# Altium PCB PCB1.PcbDoc (part 3 of 3)
Units mil, origin at the board's own origin, x right, y up, seen from the top; angles counter-clockwise.
Board outline 3937.01 x 3937.01 mil, 2 copper layers (Top Layer, Bottom Layer); 162 components, 129 nets, 526 pads, 166 vias.
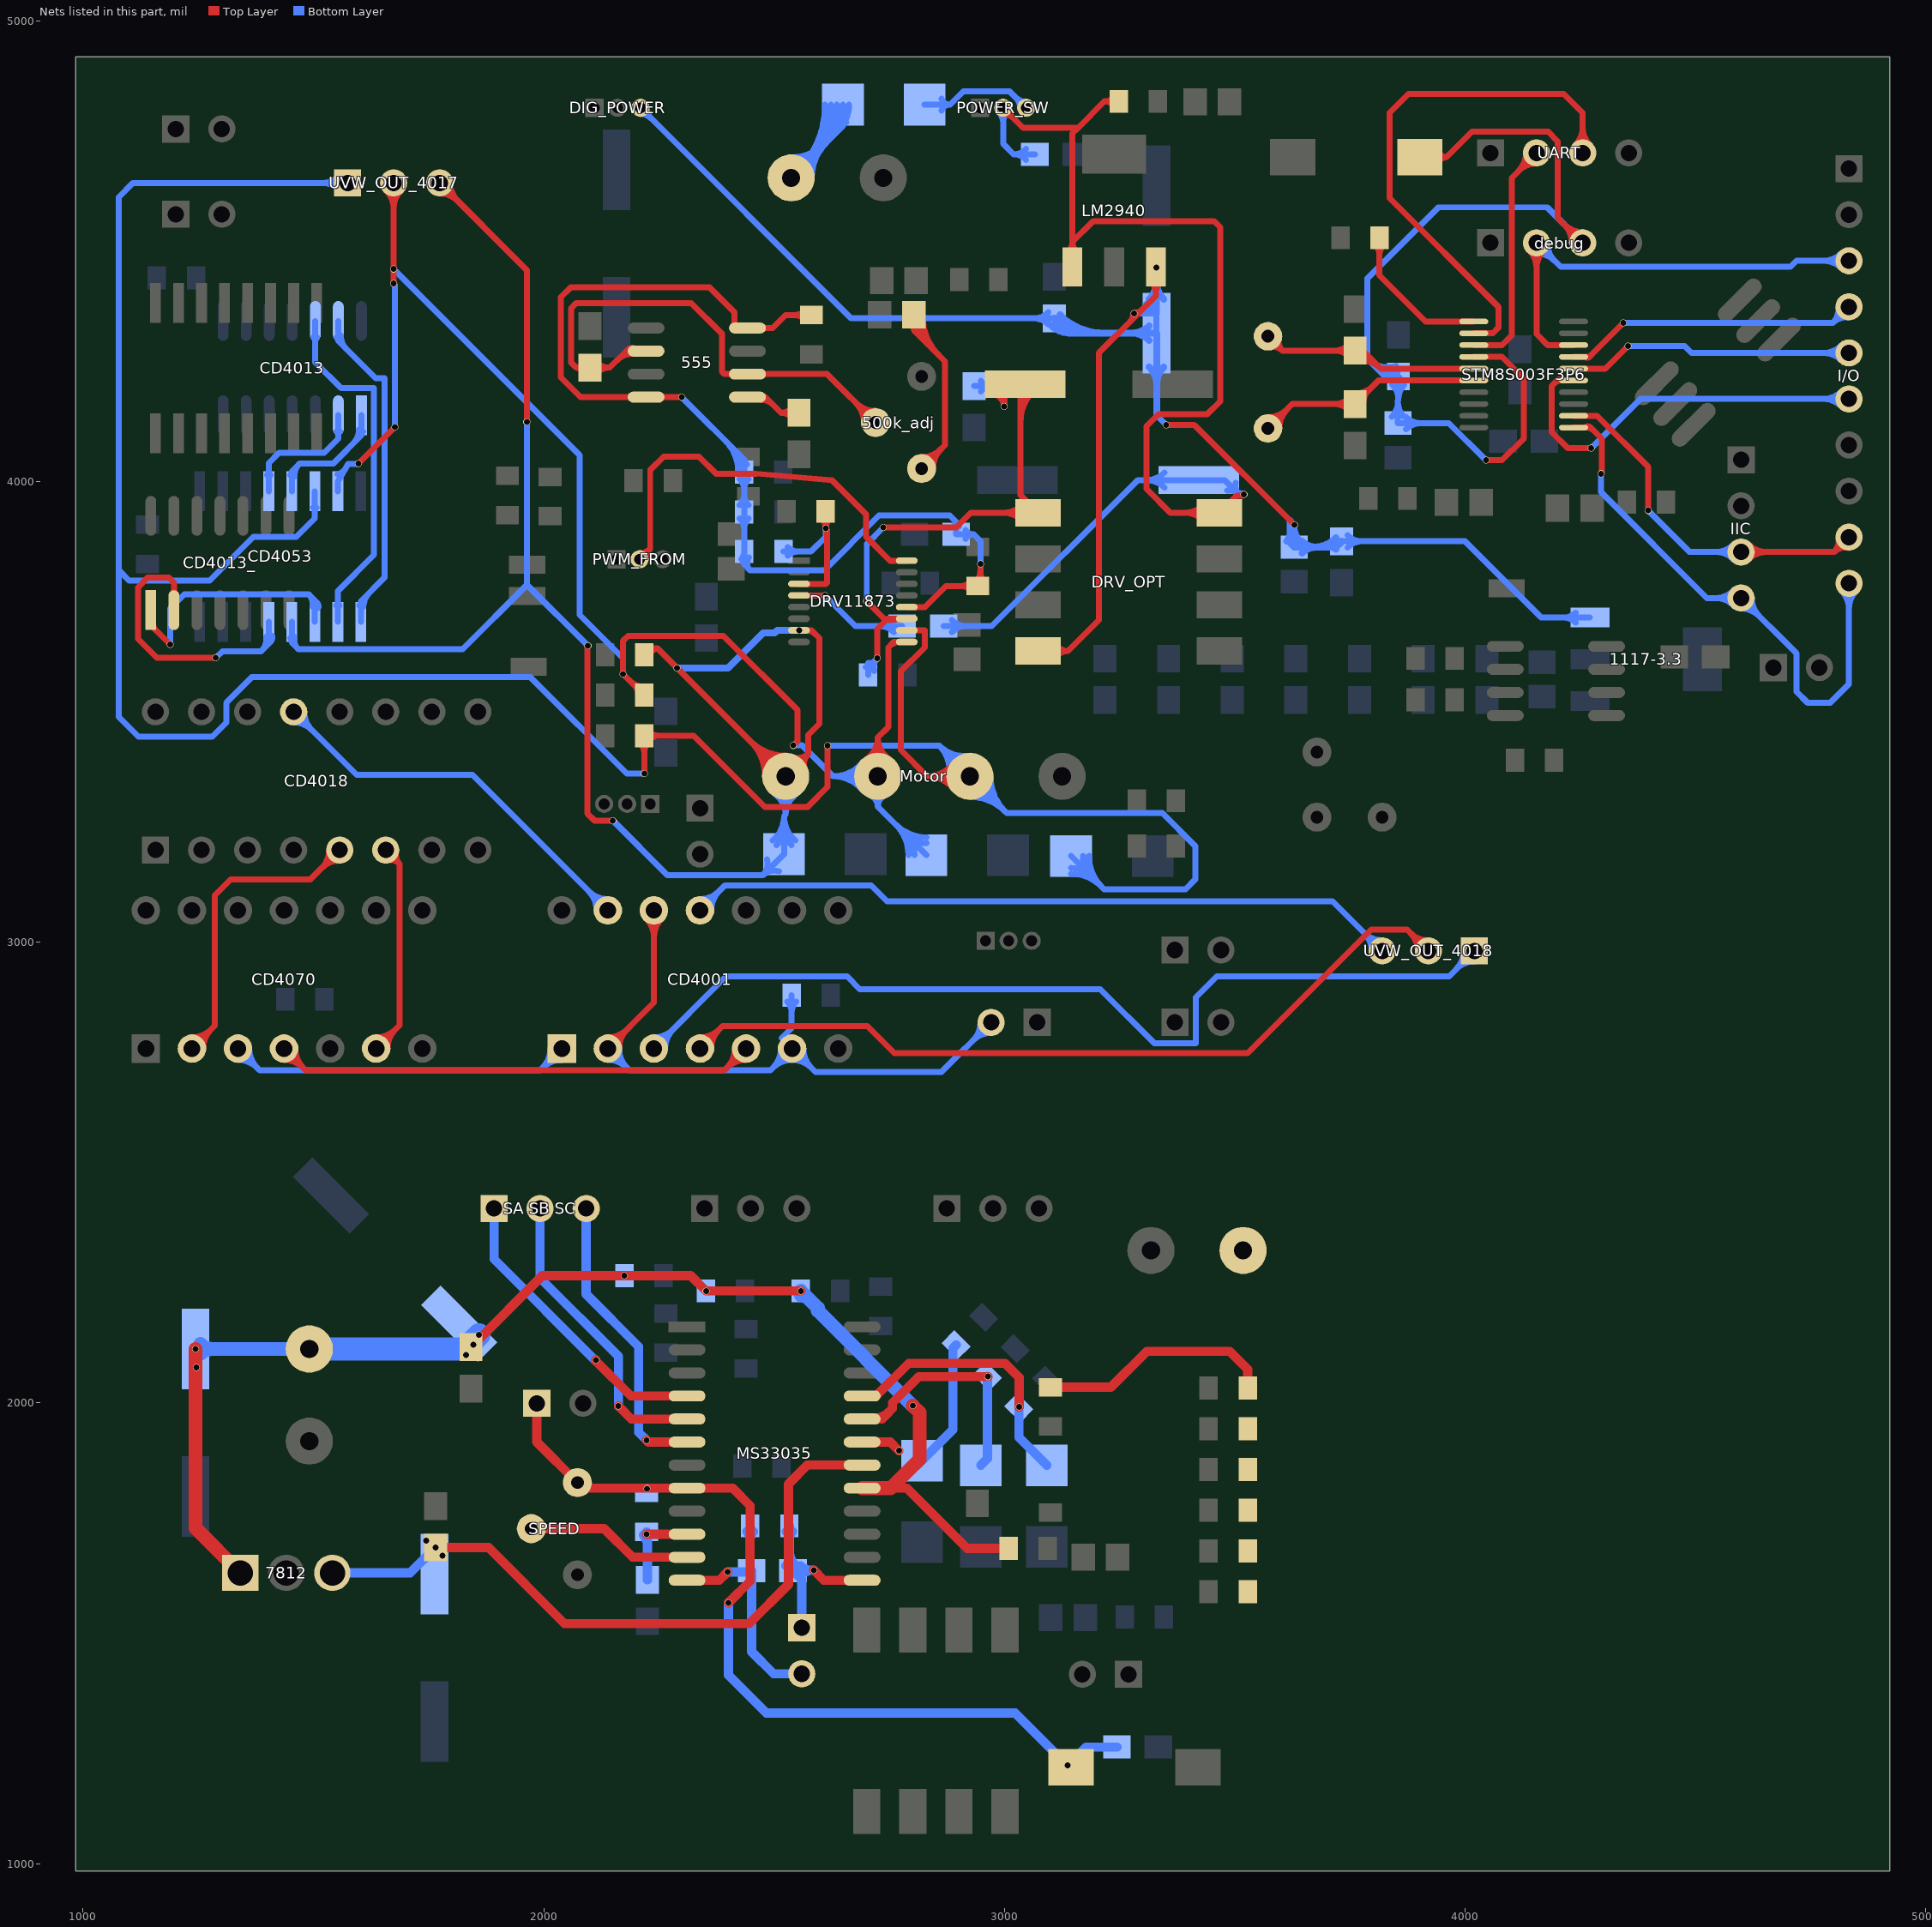
[diagram p3: the nets of this part, all layers, seen from the top]

## Via types
v1: diameter 15, hole 13, Top Layer to Bottom Layer, 166 vias

## Nets (pads, with @x,y where several pads share a name; then routed paths per layer and width w, separated by ;. In a path a pad name is that pad's centre, name@x,y a point inside that pad or via, vN(x,y) a via of type N, cw(c..) or ccw(c..) an arc to the next point about the centre after c; other vN are vias at no path point) (continued)
Net10k_3__2: 10k_3_.2 4018_SHUT.2 CD4001.2 CD4001.6 CD4001.12 | length 2015.5
  Top Layer w13: CD4001.2@2139,2769 2239,2869 CD4001.12@2239,3069 ; CD4001.2@2139,2793.5 ccw(c2139,2852.65) 2180.82,2810.82 ccw(c2222.65,2769) CD4001.2@2163.5,2769 ; CD4001.12@2221.68,3051.68 cw(c2179.85,3009.85) 2239,3009.85 cw(c2298.15,3009.85) CD4001.12@2256.32,3051.68
  Bottom Layer w13: CD4001.2@2139,2744.5 cw(c2139,2685.35) 2180.82,2727.18 cw(c2222.65,2769) CD4001.2@2163.5,2769 ; CD4001.2@2139,2769 2186,2722 2492,2722 CD4001.6@2539,2769 ; CD4001.6@2514.5,2769 cw(c2455.35,2769) 2497.18,2727.18 cw(c2539,2685.35) 2539,2744.5 cw(c2539,2685.35) 2580.82,2727.18 cw(c2622.65,2769) CD4001.6@2563.5,2769 ; 10k_3_.2@2528.45,2870.45 cw(c2505.41,2847.41) 2538,2847.41 cw(c2570.59,2847.41) 10k_3_.2@2547.55,2870.45 ; 10k_3_.2@2538,2885 2538,2813 2516.5,2791.5 CD4001.6@2539,2769 ; 4018_SHUT.2@2947.97,2826 cw(c2892.38,2826) 2931.69,2786.69 cw(c2971,2747.38) 4018_SHUT.2@2971,2802.97 ; 4018_SHUT.2@2971,2826 2863,2718 2590,2718 CD4001.6@2539,2769
Net100p_2: 100p.2 500k_adj.2 555.2 555.6 | length 1431.3
  Top Layer w13: 100p.2@2083.47,4238.69 ccw(c2070,4231.93) 2070,4247 ; 100p.2@2083.47,4255.31 cw(c2070,4262.07) 2070,4247 ; 100p.2@2113.43,4234.28 cw(c2143,4206.28) 2143,4247 ; 100p.2@2113.43,4259.72 ccw(c2143,4287.72) 2143,4247 ; 2159,4263 cw(c2194,4228.01) 555.2@2194,4277.5 ; 2181.2,4285.2 cw(c2194,4272.39) 555.2@2194,4290.5 ; 555.2@2190.11,4279.11 ccw(c2180.72,4269.72) 2180.72,4283 ccw(c2180.72,4296.28) 555.2@2190.11,4286.89 ; 555.2@2222,4283 2179,4283 2143,4247 ; 555.6@2410.11,4229.11 ccw(c2400.72,4219.72) 2400.72,4233 ccw(c2400.72,4246.28) 555.6@2410.11,4236.89 ; 555.6@2473.89,4229.11 cw(c2483.28,4219.72) 2483.28,4233 cw(c2483.28,4246.28) 555.6@2473.89,4236.89 ; 500k_adj.2@2695,4128 ccw(c2634.66,4128) 2677.33,4170.67 ccw(c2720,4213.34) 500k_adj.2@2720,4153 ; 500k_adj.2@2720,4128 2615,4233 555.6@2442,4233 2392,4233 2386.5,4238.5 2386.5,4320.5 2320,4387 2070,4387 2059,4376 2059,4258 2070,4247 ; 2070,4247 100p.2@2100,4247 2143,4247
Net104_555_2: 104_555.2 555.5 | length 213.8
  Top Layer w13: 555.5@2442,4183 2481,4183 2515,4149 ; 555.5@2470,4177.5 cw(c2470,4137.67) 2498.17,4165.83 ; 104_555.2@2539.67,4137.3 ccw(c2515,4117.15) 2515,4149 ; 104_555.2@2539.67,4160.7 cw(c2515,4180.85) 2515,4149 ; 104_555.2@2554,4149 2515,4149
Net120R_1: 120R.1 STM8S003F3P6.1 | length 379.2
  Top Layer w13: 120R.1@3804.45,4514.45 cw(c3781.41,4491.41) 3814,4491.41 cw(c3846.59,4491.41) 120R.1@3823.55,4514.45 ; 120R.1@3814,4529 3814,4447.16 3914,4347.16 STM8S003F3P6.1@4018.73,4347.16
Net470,,,_2: 470,,,.2 5824,,,.2 MS33035.19 | length 389.6
  Top Layer w20: MS33035.19@2691,1915 2752,1915 v1(2771,1896)
  Bottom Layer w20: 2805,1864.58 2810.59,1864.58 2888,1941.99 2888,2119.01 2894.83,2125.84
Net470,,_2: 470,,.2 5824,,.2 MS33035.20 | length 549.4
  Top Layer w20: MS33035.20@2691,1965 2734,1965 2757,1988 2757,2000 2814,2057 v1(2964,2057) ; MS33035.20@2719,1967 ccw(c2719,2008.04) 2748.02,1979.02
  Bottom Layer w20: 2948.5,1864.58 2963.07,1879.15 v1@2963.07,2057.61
Net470,_2: 470,.2 5824,.2 MS33035.21 | length 597.2
  Top Layer w20: MS33035.21@2691,2015 2721,2015 2792,2086 3001,2086 3032,2055 v1(3032,1991)
  Bottom Layer w20: v1@3031.3,1989.37 3031.3,1925.28 3092,1864.58
Net500k_adj_3: 500k_adj.3 5817_0.2 | length 715.5
  Top Layer w13: 5817_0.2@2795.28,4340.78 cw(c2789.28,4328) 2803.4,4328 ; 5817_0.2@2796.49,4358.06 ccw(c2852.39,4358.06) 2812.86,4318.54 ; 5817_0.2@2803.4,4362 2803.4,4328 ; 5817_0.2@2809.49,4358.06 ccw(c2896.77,4358.06) 2835.06,4296.35 ; 5817_0.2@2811.52,4340.78 ccw(c2817.53,4328) 2803.4,4328 ; 500k_adj.3@2820,4028 2871,4079 2871,4260.4 2803.4,4328 ; 500k_adj.3@2820,4053 ccw(c2820,4113.34) 2862.67,4070.67 ccw(c2905.34,4028) 500k_adj.3@2845,4028 ; 5817_0.2@2822.49,4358.06 ccw(c2941.16,4358.06) 2857.25,4274.15
Net5824_3_1: 5824_3.1 POWER_IN.1 | length 1081.7
  Bottom Layer w13: POWER_IN.1@2537,4659 2649.42,4771.42 ; POWER_IN.1@2537,4690.68 ccw(c2537,4767.17) 2591.08,4713.08 ccw(c2645.17,4659) POWER_IN.1@2568.68,4659 ; POWER_IN.1@2537,4703.68 ccw(c2537,4811.55) 2613.28,4735.28 ccw(c2689.55,4659) POWER_IN.1@2581.68,4659 ; POWER_IN.1@2550.29,4672.29 ccw(c2404.57,4818) 5824_3.1@2610.64,4818 ; POWER_IN.1@2572.48,4694.48 ccw(c2448.96,4818) 5824_3.1@2623.64,4818 ; 2594.67,4716.67 ccw(c2493.34,4818) 5824_3.1@2636.64,4818 ; 2616.86,4738.86 ccw(c2537.73,4818) 5824_3.1@2649.64,4818 ; 2639.06,4761.05 ccw(c2582.11,4818) 5824_3.1@2662.64,4818 ; 5824_3.1@2642.39,4779.87 cw(c2640.83,4771.42) 2649.42,4771.42 ; 5824_3.1@2649.42,4818 2649.42,4771.42 ; 5824_3.1@2656.45,4779.87 ccw(c2658.01,4771.42) 2649.42,4771.42
Net5824_3_2: 5824_3.2 POWER_SW.3 | length 346.7
  Bottom Layer w13: 5824_3.2@2826.58,4818 2882,4818 ; 5824_3.2@2863.01,4804.71 cw(c2882,4797.79) 2882,4818 ; 5824_3.2@2863.01,4831.29 ccw(c2882,4838.21) 2882,4818 ; POWER_SW.3@3033.82,4811 ccw(c3001.98,4811) 3024.49,4833.51 ccw(c3047,4856.02) POWER_SW.3@3047,4824.19 ; POWER_SW.3@3047,4811 3011,4847 2911,4847 2882,4818
Net,,,,,,_1: 0.05R/1W.1 100.1 ,,,,,,.1 ,,,,,.1 ,,,,.1 ,,,.1 ,,.1 MOS_GND.1 | length 593.3
  Top Layer w20: 100.1@3100,2034 3231,2034 3309,2112 3489,2112 3528,2073 0.05R/1W.1@3528,2032 ; 100.1@3112.07,2026.93 cw(c3129.14,2009.86) 3129.14,2034 cw(c3129.14,2058.14) 100.1@3112.07,2041.07 ; 0.05R/1W.1@3520.93,2044.07 ccw(c3503.86,2061.14) 3528,2061.14 ccw(c3552.14,2061.14) 0.05R/1W.1@3535.07,2044.07
Net--_1: 1.0M.2 104,,,.1 --.1 MS33035.13 | length 543.4
  Top Layer w20: v1(2586,1637) 2608,1615 MS33035.13@2691,1615
  Bottom Layer w20: 2525.39,1646.61 ccw(c2507.03,1664.97) 2533,1664.97 ; 1.0M.2@2525.93,1720.93 cw(c2508.86,1703.86) 2533,1703.86 cw(c2557.14,1703.86) 1.0M.2@2540.07,1720.93 ; 2533,1679.46 ccw(c2579.46,1679.46) 2546.61,1646.61 ; 1.0M.2@2533,1733 2533,1644 2541,1636 ; 2556.61,1625.39 cw(c2584.63,1597.37) v1@2584.63,1637 ; 2556.61,1646.61 ccw(c2579.8,1669.8) v1@2579.8,1637 ; --.1@2560,1512 2560,1617 2541,1636 ; v1(2586,1637) 2542,1637 2541,1636
Net--_2: 1.0M.1 104,,,.2 --.2 MS33035.12 | length 588
  Top Layer w20: MS33035.12@2311,1615 2381,1615 v1(2399,1633)
  Bottom Layer w20: v1(2399,1633) 2442,1633 2448,1639 ; 1.0M.1@2440.93,1720.93 cw(c2423.86,1703.86) 2448,1703.86 cw(c2472.14,1703.86) 1.0M.1@2455.07,1720.93 ; 1.0M.1@2448,1733 2448,1639 ; --.2@2560,1412 2499,1412 2451,1460 2451,1636 2448,1639
NetCD4001_3: CD4001.3 UVW_OUT_4018.1 | length 2226.8
  Bottom Layer w13: CD4001.3@2239,2769 2395.5,2925.5 2658.5,2925.5 2686,2898 3207.94,2898 3324.97,2780.97 3415.03,2780.97 3415.03,2880 3461.03,2926 3965,2926 UVW_OUT_4018.1@4020,2981 ; CD4001.3@2239,2793.5 ccw(c2239,2852.65) 2280.82,2810.82 ccw(c2322.65,2769) CD4001.3@2263.5,2769 ; UVW_OUT_4018.1@3996.97,2981 cw(c3941.38,2981) 3980.69,2941.69 cw(c4020,2902.38) UVW_OUT_4018.1@4020,2957.97
NetCD4001_4: CD4001.4 UVW_OUT_4018.2 | length 1936.1
  Top Layer w13: CD4001.4@2339,2769 2388,2818 2702.18,2818 2761.21,2758.97 3527.97,2758.97 3796,3027 3874,3027 UVW_OUT_4018.2@3920,2981 ; CD4001.4@2339,2793.5 ccw(c2339,2852.65) 2380.82,2810.82 ccw(c2422.65,2769) CD4001.4@2363.5,2769 ; UVW_OUT_4018.2@3896.97,2981 ccw(c3841.38,2981) 3880.69,3020.31 ccw(c3920,3059.62) UVW_OUT_4018.2@3920,3004.03
NetCD4001_11: CD4001.11 UVW_OUT_4018.3 | length 1742.4
  Bottom Layer w13: CD4001.11@2339,3069 2393,3123 2711,3123 2745,3089 3712,3089 UVW_OUT_4018.3@3820,2981 ; CD4001.11@2339,3093.5 ccw(c2339,3152.65) 2380.82,3110.82 ccw(c2422.65,3069) CD4001.11@2363.5,3069 ; UVW_OUT_4018.3@3796.97,2981 ccw(c3741.38,2981) 3780.69,3020.31 ccw(c3820,3059.62) UVW_OUT_4018.3@3820,3004.03
NetI/O_4: I/O.4 STM8S003F3P6.17 | length 742
  Top Layer w13: STM8S003F3P6.17@4235.27,4270.39 4270,4270.39 ; STM8S003F3P6.17@4260.48,4269.93 ccw(c4264.99,4275.4) 4270,4270.39 ; STM8S003F3P6.17@4260.86,4269.79 ccw(c4260.86,4290.43) 4275.45,4275.84 ; v1(4343.61,4344) 4270,4270.39
  Bottom Layer w13: v1(4343.61,4344) 4798,4344 ; I/O.4@4810.06,4377.03 cw(c4768.53,4373.47) 4798,4344 ; I/O.4@4831.03,4356.06 ccw(c4827.47,4314.53) 4798,4344 ; I/O.4@4833,4379 4798,4344
NetI/O_5: I/O.5 STM8S003F3P6.16 | length 711.7
  Top Layer w13: STM8S003F3P6.16@4235.27,4244.8 4303.8,4244.8 v1(4353.12,4294.12)
  Bottom Layer w13: v1(4353.12,4294.12) 4476,4294.12 4491.12,4279 I/O.5@4833,4279 ; I/O.5@4816.72,4262.72 ccw(c4777.41,4223.41) 4777.41,4279 ccw(c4777.41,4334.59) I/O.5@4816.72,4295.28
NetI/O_6: I/O.6 STM8S003F3P6.15 | length 971.9
  Top Layer w13: 4194.17,4213.38 cw(c4209.68,4197.87) STM8S003F3P6.15@4209.68,4219.8 ; STM8S003F3P6.15@4210.06,4219.66 ccw(c4205.28,4213.93) 4200,4219.2 ; STM8S003F3P6.15@4235.27,4219.2 4200,4219.2 ; v1(4273.35,4072) 4223,4072 4188,4107 4188,4207.2 4200,4219.2
  Bottom Layer w13: v1(4273.35,4072) 4380.35,4179 I/O.6@4833,4179 ; I/O.6@4816.72,4162.72 ccw(c4777.41,4123.41) 4777.41,4179 ccw(c4777.41,4234.59) I/O.6@4816.72,4195.28
NetMS33035_11: MS33035.11 SPEED.2 | length 363.7
  Top Layer w20: SPEED.2@1973,1727 2131,1727 2193,1665 MS33035.11@2311,1665
NRST: 4.7K.1 104--.2 debug.3 RST.2 STM8S003F3P6.4 | length 2708.8
  Top Layer w13: RST.2@3901.59,4704 3960,4704 ; RST.2@3941.95,4691.78 cw(c3960,4684.56) 3960,4704 ; RST.2@3941.95,4716.22 ccw(c3960,4723.44) 3960,4704 ; STM8S003F3P6.4@4018.73,4270.39 4080,4270.39 4127,4223.39 4127,4093 4080,4046 v1(4045,4046) ; debug.3@4231.97,4518 ccw(c4176.38,4518) 4215.69,4557.31 ccw(c4255,4596.62) debug.3@4255,4541.03 ; debug.3@4255,4518 4201,4572 4201,4738 4180,4759 4015,4759 3960,4704
  Bottom Layer w13: 3803.28,4250.72 ccw(c3838.69,4286.13) 104--.2@3853.39,4238.26 ; 3818.56,4235.44 ccw(c3845.87,4262.75) 104--.2@3857.2,4225.83 ; 104--.2@3838.22,4220.2 ccw(c3826,4214.52) 3826,4228 ; 104--.2@3838.22,4235.8 cw(c3826,4241.48) 3826,4228 ; 4.7K.1@3840.5,4139.9 ccw(c3807.91,4172.49) 3854,4172.49 ccw(c3900.09,4172.49) 4.7K.1@3867.5,4139.9 ; 104--.2@3841.92,4209.92 cw(c3810.34,4178.34) 3855,4178.34 cw(c3899.66,4178.34) 104--.2@3868.08,4209.92 ; 104--.2@3849.57,4250.69 cw(c3831.51,4309.51) 3788,4266 ; 4.7K.1@3871.44,4112.9 cw(c3904.03,4080.31) 3904.03,4126.4 cw(c3904.03,4172.49) 4.7K.1@3871.44,4139.9 ; v1(4045,4046) 3964.6,4126.4 4.7K.1@3854,4126.4 3854,4176 3855,4177 104--.2@3855,4228 3826,4228 ; debug.3@4231.97,4518 ccw(c4176.38,4518) 4215.69,4557.31 ccw(c4255,4596.62) debug.3@4255,4541.03 ; debug.3@4255,4518 4178,4595 3942,4595 3788,4441 3788,4266 ; 3788,4266 3826,4228
OSC: 5.1K.1 103.1 MS33035.10 | length 230.8
  Top Layer w20: v1(2223,1715) MS33035.10@2311,1715
  Bottom Layer w20: 5.1K.1@2215.93,1712.93 cw(c2194.03,1691.03) 2225,1691.03 ; 5.1K.1@2220.64,1715.83 ccw(c2235.65,1710.57) 5.1K.1@2221.88,1702.63 ; 5.1K.1@2223,1720 2225,1718 103.1@2225,1616
OSCIN: 8M.2 20P_1.2 STM8S003F3P6.5 | length 699.5
  Top Layer w13: 8M.2@3572,4315 3603,4284 ; 8M.2@3577.68,4291.17 cw(c3583.93,4264.93) 3603,4284 ; 8M.2@3595.83,4309.32 ccw(c3622.07,4303.07) 3603,4284 ; 20P_1.2@3747.92,4270.92 ccw(c3716.34,4239.34) 3716.34,4284 ccw(c3716.34,4328.66) 20P_1.2@3747.92,4297.08 ; 20P_1.2@3762.06,4273.6 cw(c3770.16,4232.27) 3799.95,4262.05 ; 20P_1.2@3764.56,4260.85 cw(c3775.82,4203.42) 3817.2,4244.8 ; STM8S003F3P6.5@4018.73,4244.8 3817.2,4244.8 ; 3603,4284 20P_1.2@3761,4284 3778,4284 3817.2,4244.8
OSCOUT: 8M.1 20P_2.2 STM8S003F3P6.6 | length 723.1
  Top Layer w13: 8M.1@3572,4115 3625,4168 20P_2.2@3761,4168 3812.2,4219.2 STM8S003F3P6.6@4018.73,4219.2 ; 8M.1@3572,4139.5 ccw(c3572,4198.65) 3613.82,4156.82 ccw(c3655.65,4115) 8M.1@3596.5,4115 ; 20P_2.2@3747.92,4154.92 ccw(c3716.34,4123.34) 3716.34,4168 ccw(c3716.34,4212.66) 20P_2.2@3747.92,4181.08 ; 20P_2.2@3761,4191.5 ccw(c3761,4248.23) 3801.12,4208.12 ; 20P_2.2@3779.5,4173 cw(c3812.09,4173) 3789.05,4196.05
PWM: DRV11873.16 PWM_FROM.2 | length 938.9
  Top Layer w13: PWM_FROM.2@2208,3831 2231,3854 2231,4025 2260,4054 2337,4054 2374,4017 2461,4017 2625,4003 2700,3928 2700,3880 2752,3828 DRV11873.16@2787.86,3828 ; PWM_FROM.2@2208,3844.18 ccw(c2208,3876.02) 2230.51,3853.51 ccw(c2253.02,3831) PWM_FROM.2@2221.18,3831
Q1: CD4013.1 CD4053.13 | length 372.1
  Bottom Layer w13: CD4053.13@1449.43,4014.16 ccw(c1442.13,4022.21) 1453,4022.21 ; CD4053.13@1453,3978.73 1453,4022.21 ; CD4053.13@1456.57,4014.16 cw(c1463.87,4022.21) 1453,4022.21 ; CD4053.13@1458.31,4010.32 cw(c1498.23,4010.98) 1470,4039.21 ; 1586.35,4082.35 ccw(c1556.55,4112.14) CD4013.1@1598.69,4112.14 ; CD4013.1@1600.4,4108.24 cw(c1592.78,4100) 1604,4100 ; CD4013.1@1604,4143.64 1604,4100 ; CD4013.1@1607.6,4108.24 ccw(c1615.22,4100) 1604,4100 ; 1453,4022.21 1470,4039.21 ; 1470,4039.21 1543.21,4039.21 1604,4100
Q1-: CD4013.2 CD4053.12 | length 325.1
  Bottom Layer w13: CD4053.12@1399.24,4013.98 ccw(c1390.18,4023.05) 1403,4023.05 ccw(c1415.82,4023.05) CD4053.12@1406.76,4013.98 ; CD4053.12@1403,3978.73 1403,4040 1425,4062 1523,4062 1554,4093 CD4013.2@1554,4143.64 ; CD4013.2@1550.24,4108.39 cw(c1541.18,4099.32) 1554,4099.32 cw(c1566.82,4099.32) CD4013.2@1557.76,4108.39
Q2: CD4013.13 CD4053.1 | length 832.3
  Bottom Layer w13: CD4013.13@1550.46,4312.9 cw(c1543.4,4305) 1554,4305 ; CD4013.13@1554,4348.36 1554,4305 ; CD4013.13@1557.54,4312.9 ccw(c1564.6,4305) 1554,4305 ; CD4013.13@1559.31,4316.87 ccw(c1600.78,4316.87) 1571.46,4287.54 ; CD4053.1@1599.24,3730.52 ccw(c1590.18,3739.59) 1603,3739.59 ccw(c1615.82,3739.59) CD4053.1@1606.76,3730.52 ; CD4053.1@1603,3695.27 1603,3740 1654,3791 1654,4223.76 1653.31,4224.45 1634.55,4224.45 1554,4305 ; CD4053.1@1608.31,3726.76 cw(c1653.09,3726.76) 1621.43,3758.43
Q2-: CD4013.12 CD4053.2 | length 820.3
  Bottom Layer w13: CD4013.12@1500.24,4313.11 cw(c1491.18,4304.04) 1504,4304.04 cw(c1516.82,4304.04) CD4013.12@1507.76,4313.11 ; CD4013.12@1504,4348.36 1504,4258.45 1560,4202.45 1631.31,4202.45 1631.31,3840.31 1553,3762 CD4053.2@1553,3695.27 ; CD4053.2@1549.24,3730.52 ccw(c1540.18,3739.59) 1553,3739.59 ccw(c1565.82,3739.59) CD4053.2@1556.76,3730.52
Q3: CD4013_.1 CD4053.3 | length 626.4
  Top Layer w13: CD4013_.1@1147,3720.64 1147,3686 1149,3686 v1(1189,3646) ; CD4013_.1@1152.31,3689.14 ccw(c1167.89,3689.14) CD4013_.1@1156.87,3678.13
  Bottom Layer w13: v1(1189,3646) 1189,3724 1220,3755 1490,3755 ; CD4053.3@1497.82,3727.94 ccw(c1469.38,3734.38) 1490,3755 ; CD4053.3@1499.24,3730.52 ccw(c1490.18,3739.59) 1503,3739.59 ccw(c1515.82,3739.59) CD4053.3@1506.76,3730.52 ; CD4053.3@1503,3695.27 1503,3742 1490,3755 ; CD4053.3@1506.66,3738.34 cw(c1496.55,3728.22) CD4053.3@1510.5,3725.06
Q3-: CD4013_.2 CD4053.5 | length 713.8
  Top Layer w13: CD4013_.2@1193.24,3755.89 ccw(c1184.18,3764.96) 1197,3764.96 ccw(c1209.82,3764.96) CD4013_.2@1200.76,3755.89 ; CD4013_.2@1197,3720.64 1197,3780 1186,3791 1140,3791 1119,3770 1119,3658 1160,3617 v1(1288,3617)
  Bottom Layer w13: v1(1288,3617) 1302.56,3631.56 1386.56,3631.56 ; CD4053.5@1397.72,3663.2 cw(c1359.08,3659.04) 1386.56,3631.56 ; CD4053.5@1399.24,3660.02 cw(c1390.18,3650.95) 1403,3650.95 cw(c1415.82,3650.95) CD4053.5@1406.76,3660.02 ; CD4053.5@1403,3695.27 1403,3648 1386.56,3631.56 ; 1405.77,3650.77 ccw(c1393.76,3662.78) CD4053.5@1410.64,3664.6
Q11: CD4018.5 CD4070.2 | length 845.5
  Top Layer w13: CD4070.2@1236.17,2769 1286,2818.83 1286,3102 1320,3136 1493,3136 CD4018.5@1557,3200 ; CD4070.2@1236.17,2793.5 ccw(c1236.17,2852.65) 1278,2810.82 ccw(c1319.82,2769) CD4070.2@1260.67,2769 ; CD4018.5@1533.97,3200 cw(c1478.38,3200) 1517.69,3160.69 cw(c1557,3121.38) CD4018.5@1557,3176.97
Q33: CD4018.6 CD4070.6 | length 612.2
  Top Layer w13: CD4070.6@1636.17,2769 1687,2819.83 1687,3170 ; CD4070.6@1636.17,2793.5 ccw(c1636.17,2852.65) 1678,2810.82 ccw(c1719.82,2769) CD4070.6@1660.67,2769 ; CD4018.6@1657,3200 1687,3170 ; CD4018.6@1661.78,3177.47 cw(c1667.51,3150.51) 1687,3170 ; CD4018.6@1679.53,3195.22 ccw(c1706.49,3189.49) 1687,3170
Q55: CD4001.13 CD4018.13 | length 1040.8
  Bottom Layer w13: CD4018.13@1457,3476.97 cw(c1457,3421.38) 1496.31,3460.69 cw(c1535.62,3500) CD4018.13@1480.03,3500 ; CD4018.13@1457,3500 1594,3363 1845,3363 CD4001.13@2139,3069 ; CD4001.13@2114.5,3069 ccw(c2055.35,3069) 2097.18,3110.82 ccw(c2139,3152.65) CD4001.13@2139,3093.5
Q111: CD4001.1 CD4070.3 | length 927.6
  Bottom Layer w13: CD4070.3@1336.17,2744.5 cw(c1336.17,2685.35) 1378,2727.18 cw(c1419.82,2769) CD4070.3@1360.67,2769 ; CD4070.3@1336.17,2769 1383.17,2722 1992,2722 CD4001.1@2039,2769 ; CD4001.1@2014.5,2769 cw(c1955.35,2769) 1997.18,2727.18 cw(c2039,2685.35) CD4001.1@2039,2744.5
Q333: CD4001.5 CD4070.4 | length 1227.6
  Top Layer w13: CD4070.4@1436.17,2744.5 cw(c1436.17,2685.35) 1478,2727.18 cw(c1519.82,2769) CD4070.4@1460.67,2769 ; CD4070.4@1436.17,2769 1483.17,2722 2392,2722 CD4001.5@2439,2769 ; CD4001.5@2414.5,2769 cw(c2355.35,2769) 2397.18,2727.18 cw(c2439,2685.35) CD4001.5@2439,2744.5
RD: 1K_1.2 10K_2.2 DRV11873.3 | length 452.6
  Top Layer w13: DRV11873.3@2554,3777.61 2612.22,3777.61 2615.12,3780.51 2615.12,3894.88 v1(2612,3898) ; 1K_1.2@2602.58,3920.33 cw(c2580.83,3898) v1(2612,3898) ; v1@2611.29,3897.29 cw(c2602.04,3888.04) 2615.12,3888.04 ; 1K_1.2@2612,3935 v1(2612,3898) ; 1K_1.2@2621.42,3920.33 ccw(c2643.17,3898) v1(2612,3898)
  Bottom Layer w13: 10K_2.2@2520,3848 2580,3848 2612,3880 v1(2612,3898) ; 10K_2.2@2529.55,3838.45 cw(c2552.59,3815.41) 2552.59,3848 cw(c2552.59,3880.59) 10K_2.2@2529.55,3857.55
REF_OUT: 5.1K.2 47UF.1 MS33035.8 REF_OUT.1 RESET.2 SPEED.1 | length 1932.4
  Top Layer w20: REF_OUT.1@1985,1999 1985,1915 SPEED.1@2073,1827 2085,1815 MS33035.8@2311,1815 2410,1815 2448,1777 2448,1613 v1(2401,1566)
  Bottom Layer w20: v1(2401,1566) 2401,1409 2483,1327 3023,1327 v1(3137,1213) 3177,1253 47UF.1@3244,1253
  other v1: 2224,1814
RX: STM8S003F3P6.3 UART.2 | length 596.7
  Top Layer w13: STM8S003F3P6.3@4018.73,4295.98 4080,4295.98 4101,4316.98 4101,4659 UART.2@4155,4713 ; UART.2@4131.97,4713 cw(c4076.38,4713) 4115.69,4673.69 cw(c4155,4634.38) UART.2@4155,4689.97
SA: "SA SB SC.1" MS33035.4 | length 656
  Top Layer w20: v1(2113,2093) 2113,2091 2189,2015 MS33035.4@2311,2015
  Bottom Layer w20: 1892,2422 1892,2312 2113,2091 v1(2113,2093)
SB: "SA SB SC.2" MS33035.5 | length 660
  Top Layer w20: v1(2162,1993) 2190,1965 MS33035.5@2311,1965
  Bottom Layer w20: 1992,2422 1992,2271 2162,2101 v1(2162,1993)
SC: "SA SB SC.3" MS33035.6 | length 646.9
  Top Layer w20: v1(2223,1919) 2227,1915 MS33035.6@2311,1915
  Bottom Layer w20: 2092,2422 2092,2236 2206,2122 2206,1936 v1(2223,1919)
SCL: I/O.9 IIC.3 STM8S003F3P6.12 | length 1025.6
  Top Layer w13: STM8S003F3P6.12@4235.27,4142.43 4286.41,4142.43 4397,4031.84 v1(4397,3937) ; IIC.3@4599,3847 4801,3847 ; IIC.3@4615.28,3830.72 cw(c4654.59,3791.41) 4654.59,3847 cw(c4654.59,3902.59) IIC.3@4615.28,3863.28 ; I/O.9@4810.25,3875.42 cw(c4777.7,3870.3) 4801,3847 ; I/O.9@4829.42,3856.25 ccw(c4824.3,3823.7) 4801,3847 ; I/O.9@4833,3879 4801,3847
  Bottom Layer w13: v1(4397,3937) 4487,3847 IIC.3@4599,3847 ; IIC.3@4582.72,3830.72 ccw(c4543.41,3791.41) 4543.41,3847 ccw(c4543.41,3902.59) IIC.3@4582.72,3863.28
SDA: I/O.10 IIC.4 STM8S003F3P6.11 | length 1495.4
  Top Layer w13: STM8S003F3P6.11@4235.27,4116.84 4272.58,4116.84 ; STM8S003F3P6.11@4260.47,4117.29 cw(c4266.28,4110.55) 4272.58,4116.84 ; STM8S003F3P6.11@4260.86,4117.44 cw(c4260.86,4090.58) 4279.85,4109.57 ; v1(4295,4017) 4296.35,4018.35 4296.35,4093.07 4272.58,4116.84
  Bottom Layer w13: v1(4295,4017) 4295,3977 4525,3747 IIC.4@4599,3747 4719,3627 4719,3544 4743,3520 4793,3520 4833,3560 I/O.10@4833,3779 ; IIC.4@4582.72,3730.72 ccw(c4543.41,3691.41) 4543.41,3747 ccw(c4543.41,3802.59) IIC.4@4582.72,3763.28 ; IIC.4@4599,3723.97 cw(c4599,3668.38) 4638.31,3707.69 cw(c4677.62,3747) IIC.4@4622.03,3747 ; I/O.10@4816.72,3762.72 cw(c4777.41,3723.41) 4833,3723.41 cw(c4888.59,3723.41) I/O.10@4849.28,3762.72
SWIM: debug.2 I/O.3 STM8S003F3P6.18 | length 1255.1
  Top Layer w13: debug.2@4138.72,4501.72 cw(c4099.41,4462.41) 4155,4462.41 cw(c4210.59,4462.41) debug.2@4171.28,4501.72 ; debug.2@4155,4518 4155,4320 4179.02,4295.98 STM8S003F3P6.18@4235.27,4295.98
  Bottom Layer w13: debug.2@4155,4494.97 cw(c4155,4439.38) 4194.31,4478.69 cw(c4233.62,4518) debug.2@4178.03,4518 ; debug.2@4155,4518 4207,4466 4706,4466 4719,4479 I/O.3@4833,4479 ; I/O.3@4816.72,4462.72 ccw(c4777.41,4423.41) 4777.41,4479 ccw(c4777.41,4534.59) I/O.3@4816.72,4495.28
TX: STM8S003F3P6.2 UART.3 | length 1249.7
  Top Layer w13: STM8S003F3P6.2@4018.73,4321.57 4060,4321.57 4072,4333.57 4072,4379 3836,4615 3836,4800 3877,4841 4214,4841 4255,4800 UART.3@4255,4713 ; UART.3@4238.72,4729.28 ccw(c4199.41,4768.59) 4255,4768.59 ccw(c4310.59,4768.59) UART.3@4271.28,4729.28
U: 1K_3_.2 5824.2 CD4053.14 DRV11873.10 Motor.2 UVW_OUT_4017.1 | length 7133
  Top Layer w13: 1K_3_.2@2208.45,3433.45 cw(c2185.41,3410.41) 2218,3410.41 cw(c2250.59,3410.41) 1K_3_.2@2227.55,3433.45 ; v1(2218,3366) 1K_3_.2@2218,3448 2325.32,3448 2480,3293.32 2572.62,3293.32 2616.09,3336.78 v1(2616.09,3426.68) ; 1K_3_.2@2227.55,3438.45 cw(c2250.59,3415.41) 2250.59,3448 cw(c2250.59,3480.59) 1K_3_.2@2227.55,3457.55 ; DRV11873.10@2787.86,3676.82 2827,3676.82 2827,3640 2775,3588 2775,3417 2832,3360 ; Motor.2@2890.12,3332.08 ccw(c2832,3285.56) 2832,3360 ; Motor.2@2890.12,3387.92 cw(c2832,3434.44) 2832,3360 ; Motor.2@2900.27,3340.2 ccw(c2859.06,3307.22) 2859.06,3360 ccw(c2859.06,3412.78) Motor.2@2900.27,3379.8 ; Motor.2@2925,3360 2832,3360
  Bottom Layer w13: CD4053.14@1499.24,3943.48 cw(c1490.18,3934.41) 1503,3934.41 cw(c1515.82,3934.41) CD4053.14@1506.76,3943.48 ; CD4053.14@1503,3978.73 1503,3920 1463,3880 1370,3880 1275,3785 1100,3785 1077,3808 ; UVW_OUT_4017.1@1557.72,4631.72 ccw(c1518.41,4592.41) 1518.41,4648 ccw(c1518.41,4703.59) UVW_OUT_4017.1@1557.72,4664.28 ; UVW_OUT_4017.1@1574,4648 1108,4648 1077,4617 1077,3808 ; v1(2218,3366) 2180,3366 1971,3575 1366,3575 1311,3520 1311,3477 1280,3446 1120,3446 1077,3489 1077,3808 ; v1(2616.09,3426.68) 2858.32,3426.68 ; Motor.2@2880.54,3364.44 ccw(c2803.76,3372.11) 2858.32,3426.68 ; Motor.2@2893.48,3363.15 ccw(c2839.03,3368.59) 2877.72,3407.28 ccw(c2916.41,3445.97) Motor.2@2921.85,3391.52 ; Motor.2@2920.56,3404.46 cw(c2912.89,3481.24) 2858.32,3426.68 ; Motor.2@2925,3315.32 cw(c2925,3207.45) 3001.28,3283.72 cw(c3077.55,3360) Motor.2@2969.68,3360 ; Motor.2@2925,3328.32 cw(c2925,3251.83) 2979.08,3305.92 cw(c3033.17,3360) Motor.2@2956.68,3360 ; 5824.2@3144.42,3148.22 cw(c3144.42,3054.61) 3210.61,3120.81 cw(c3276.81,3187) 5824.2@3183.19,3187 ; 5824.2@3144.42,3161.22 cw(c3144.42,3099) 3188.42,3143 cw(c3232.42,3187) 5824.2@3170.19,3187 ; 5824.2@3144.42,3187 3216.42,3115 3393,3115 3414,3136 3414,3209 3343,3280 3005,3280 Motor.2@2925,3360 2858.32,3426.68
V: 1K_4_.2 5824_1.2 CD4053.15 DRV11873.9 Motor.3 UVW_OUT_4017.2 | length 4182.5
  Top Layer w13: v1(1598,4039) v1(1677,4118) ; UVW_OUT_4017.2@1657.72,4631.72 cw(c1618.41,4592.41) 1674,4592.41 cw(c1729.59,4592.41) UVW_OUT_4017.2@1690.28,4631.72 ; v1(1674,4430) v1(1674,4461) UVW_OUT_4017.2@1674,4648 ; 2186.42,3567.58 ccw(c2218,3599.16) 1K_4_.2@2218,3554.5 ; 1K_4_.2@2198.49,3555.51 cw(c2183.98,3541) 1K_4_.2@2204.5,3541 ; 1K_4_.2@2218,3536 v1(2172,3582) 2172,3654 2183,3665 2390,3665 2551.09,3503.91 2551.09,3437.09 v1(2541,3427) ; Motor.3@2700.03,3397.05 ccw(c2668.39,3444) 2725,3444 ; Motor.3@2707.29,3386.27 ccw(c2684.86,3419.56) 2725,3419.56 ccw(c2765.14,3419.56) Motor.3@2742.71,3386.27 ; Motor.3@2725,3360 2725,3444 ; Motor.3@2749.97,3397.05 cw(c2781.61,3444) 2725,3444 ; 2750.35,3642.35 cw(c2771.32,3621.37) DRV11873.9@2771.32,3651.04 ; DRV11873.9@2787.86,3651.62 2759.62,3651.62 2748,3640 2748,3467 2725,3444
  Bottom Layer w13: CD4053.15@1551.7,4015.38 ccw(c1544.18,4045.17) 1570.56,4029.42 ; CD4053.15@1553,3978.73 1553,4000 1575.69,4038 1598,4038 v1(1598,4039) ; v1@1673.29,4429.29 cw(c1664.34,4420.34) 1677,4420.34 ; v1(1674,4430) 1677,4427 v1(1677,4118) ; v1(1674,4461) 2078,4057 2078,3710.43 2172,3616.43 v1(2172,3582) ; v1(2541,3427) 2561,3427 2628,3360 ; Motor.3@2691.04,3330.96 ccw(c2628.01,3277.06) 2628.01,3360 ; Motor.3@2691.04,3389.04 cw(c2628.01,3442.94) 2628.01,3360 ; Motor.3@2700.92,3339.41 ccw(c2656.23,3301.19) 2656.23,3360 ccw(c2656.23,3418.81) Motor.3@2700.92,3380.59 ; Motor.3@2708.65,3318.42 cw(c2699.21,3294.42) 2725,3294.42 ; Motor.3@2741.35,3318.42 ccw(c2750.79,3294.42) 2725,3294.42 ; 5824_1.2@2791.64,3189 ccw(c2698.03,3189) 2764.22,3255.19 ccw(c2830.42,3321.39) 5824_1.2@2830.42,3227.78 ; 5824_1.2@2804.64,3189 ccw(c2742.41,3189) 2786.42,3233 ccw(c2830.42,3277) 5824_1.2@2830.42,3214.78 ; 5824_1.2@2830.42,3189 2725,3294.42 ; 2628,3360 Motor.3@2725,3360 2725,3294.42
V5: 1K_5__.2 2.2UF.2 10K.2 10K_1.1 10K_2.1 10k_3.2 555.4 555.8 DRV11873.12 | length 3052.6
  Top Layer w13: 555.4@2190.11,4179.11 ccw(c2180.72,4169.72) 2180.72,4183 ccw(c2180.72,4196.28) 555.4@2190.11,4186.89 ; 555.4@2253.89,4179.11 cw(c2263.28,4169.72) 2263.28,4183 cw(c2263.28,4196.28) 555.4@2253.89,4186.89 ; v1(2299,4183) 555.4@2222,4183 2080,4183 2037,4226 2037,4400 2058,4421 2360,4421 2414,4367 2414,4333 555.8@2442,4333 2497,4333 2525,4361 1K_5__.2@2581,4361 ; 555.8@2410.11,4336.89 ccw(c2400.72,4346.28) 2414,4346.28 ccw(c2427.28,4346.28) 555.8@2417.89,4336.89 ; 555.8@2473.89,4329.11 cw(c2483.28,4319.72) 2483.28,4333 cw(c2483.28,4346.28) 555.8@2473.89,4336.89 ; 1K_5__.2@2566.45,4351.45 ccw(c2543.41,4328.41) 2543.41,4361 ccw(c2543.41,4393.59) 1K_5__.2@2566.45,4370.55 ; DRV11873.12@2787.86,3727.21 2827,3727.21 2872.79,3773 10k_3.2@2942,3773 2948,3773 v1(2948,3821) ; 10k_3.2@2927.45,3763.45 ccw(c2904.41,3740.41) 2904.41,3773 ccw(c2904.41,3805.59) 10k_3.2@2927.45,3782.55 ; 10k_3.2@2937.45,3782.55 ccw(c2911.99,3808.01) 2948,3808.01 ; 2948,3803.18 ccw(c2977.18,3803.18) 10k_3.2@2956.55,3782.55
  Bottom Layer w13: v1(2299,4183) 2434.9,4047.1 ; 2396.22,4085.78 cw(c2335.44,4025) 10K.2@2421.4,4025 ; 2418.41,4063.59 cw(c2379.83,4025) 10K.2@2434.4,4025 ; 10K.2@2425.35,4005.45 cw(c2402.3,3982.41) 2434.9,3982.41 cw(c2467.49,3982.41) 10K.2@2444.44,4005.45 ; 10K_1.1@2425.45,3919.45 cw(c2402.41,3896.41) 2435,3896.41 cw(c2467.59,3896.41) 10K_1.1@2444.55,3919.45 ; 10K_1.1@2425.45,3948.55 ccw(c2402.41,3971.59) 2435,3971.59 ccw(c2467.59,3971.59) 10K_1.1@2444.55,3948.55 ; 10K_2.1@2428.42,3831.21 cw(c2422.16,3820) 2435,3820 ; 10K.2@2428.73,4037.01 ccw(c2423.55,4047.1) 2434.9,4047.1 ; 10K_2.1@2435.4,3842.7 ccw(c2450.3,3831.26) 2437.02,3817.98 ; 10K.2@2441.06,4037.01 cw(c2446.24,4047.1) 2434.9,4047.1 ; 10K_2.1@2441.58,3831.21 ccw(c2447.84,3820) 2435,3820 ; 10K_2.1@2445.71,3834.78 ccw(c2462.16,3822.16) 2447.5,3807.5 ; 2.2UF.2@2888.32,3902.25 ccw(c2884.55,3912) 2895,3912 ; 2.2UF.2@2901.68,3902.25 cw(c2905.45,3912) 2895,3912 ; 2.2UF.2@2915.78,3875.35 cw(c2933,3864.82) 2933,3885 ; 2.2UF.2@2915.78,3894.65 ccw(c2933,3905.18) 2933,3885 ; v1(2948,3821) 2948,3870 2933,3885 ; 2434.9,4047.1 10K.2@2434.9,4020 2434.9,3976.1 2435,3976 10K_1.1@2435,3934 10K_2.1@2435,3848 2435,3820 ; 2435,3820 2447.5,3807.5 ; 2447.5,3807.5 2609,3807.5 2727.5,3926 2881,3926 2895,3912 ; 2895,3912 2.2UF.2@2895,3885 2933,3885
VCC: 1K_2.2 104.1 104_2.2 1000UF.1 DRV_OPT.8 LM2940.1 POWER_SW.2 | length 3459.9
  Top Layer w13: POWER_SW.2@2997,4797.81 cw(c2997,4765.98) 3019.51,4788.49 cw(c3042.02,4811) POWER_SW.2@3010.18,4811 ; POWER_SW.2@2997,4811 3040,4768 3160,4768 ; LM2940.1@3137.46,4497.97 ccw(c3118.17,4520) 3147.45,4520 ; LM2940.1@3147.45,4465.91 3147.45,4520 ; LM2940.1@3157.43,4497.97 cw(c3176.73,4520) 3147.45,4520 ; 1K_2.2@3238.12,4815.8 ccw(c3217,4796.16) 3217,4825 ; 1K_2.2@3238.12,4834.2 cw(c3217,4853.84) 3217,4825 ; 1K_2.2@3248,4825 3217,4825 ; DRV_OPT.8@3430.88,3915.72 ccw(c3391.57,3876.41) 3391.57,3932 ccw(c3391.57,3987.59) DRV_OPT.8@3430.88,3948.28 ; DRV_OPT.8@3503.44,3947.64 cw(c3514.74,3958.11) 3503.85,3969 ; 3510.34,3969 ccw(c3510.34,3981.66) v1@3519.29,3972.71 ; v1(3520,3972) 3517,3969 3503.85,3969 ; 3147.45,4520 3147.45,4755.45 3160,4768 ; 3147.45,4520 3192.45,4565 3455,4565 3468,4552 3468,4174 3440,4146 3334,4146 3308,4120 3308,3984 3360,3932 DRV_OPT.8@3466.85,3932 3503.85,3969 ; 3160,4768 3217,4825
  Bottom Layer w13: 104.1@2868,3686 2972.55,3686 3289.55,4003 1000UF.1@3421.85,4003 3478,4003 3509,3972 ; 104.1@2886.08,3672.92 cw(c2917.66,3641.34) 2917.66,3686 cw(c2917.66,3730.66) 104.1@2886.08,3699.08 ; POWER_SW.2@2987.68,4801.68 cw(c2965.17,4779.17) 2997,4779.17 cw(c3028.83,4779.17) POWER_SW.2@3006.32,4801.68 ; POWER_SW.2@2997,4811 2997,4733 3020,4710 ; 104_2.2@3047.13,4697.76 ccw(c3020,4673.82) 3020,4710 ; 104_2.2@3047.13,4722.24 cw(c3020,4746.18) 3020,4710 ; 104_2.2@3066,4710 3020,4710 ; 1000UF.1@3347.73,3986.38 ccw(c3307.62,3946.27) 3307.62,4003 ccw(c3307.62,4059.73) 1000UF.1@3347.73,4019.62 ; 1000UF.1@3483.62,3979.89 cw(c3488.8,3951.81) 3509,3972 ; 1000UF.1@3499.51,3981.49 ccw(c3520,4001.97) v1@3520,3973 ; 1000UF.1@3502.11,3997.16 ccw(c3527.62,3990.62) 3509,3972 ; v1(3520,3972) 3509,3972
VCC_12V: 104,-.2 220UF,.1 7812.3 MS33035.18 | length 1511.3
  Top Layer w20: v1(1765,1686) 1880,1686 2045,1521 2446,1521 2531,1606 2531,1824 2572,1865 MS33035.18@2691,1865
  Bottom Layer w20: 7812.3@1541,1631 1710,1631 v1(1765,1686)
  other v1: 1780,1668 1745,1701
VCC_DRV: 1K_3.2 10uf.2 220UF.1 DRV11873.11 DRV_OPT.1 | length 1767.3
  Top Layer w13: v1(2701,3740) 2742.5,3698.5 ; v1(2724,3616) 2724,3680 2742.5,3698.5 ; v1(2737,3900) 2895,3900 2927,3932 DRV_OPT.1@3073.15,3932 3034.67,3970.48 ; 220UF.1@2979.73,4188.82 cw(c2970.2,4161.64) v1@2999,4161.64 ; 220UF.1@2984.03,4201.09 cw(c2976.63,4179.98) 2999,4179.98 ; v1(2999,4163) 2999,4211 220UF.1@3034.67,4211 ; 220UF.1@2999,4182.03 cw(c3016.47,4182.03) 220UF.1@3004.12,4194.38 ; 220UF.1@3028.38,4194.38 cw(c3013.2,4179.2) 3034.67,4179.2 ; 3034.67,4129.34 cw(c3126.66,4129.34) 220UF.1@3061.62,4194.38 ; 3034.67,4160.72 cw(c3095.28,4160.72) 220UF.1@3052.42,4203.58 ; DRV_OPT.1@3035.76,3946.73 ccw(c3022.2,3958.01) 3034.67,3970.48 ; DRV_OPT.1@3037.18,3915.72 ccw(c2997.87,3876.41) 2997.87,3932 ccw(c2997.87,3987.59) DRV_OPT.1@3037.18,3948.28 ; DRV_OPT.1@3044.75,3960.4 cw(c3033.2,3948.86) DRV_OPT.1@3045.76,3938.41 ; 220UF.1@3045,4211 220UF.1@3034.67,4211 ; 2742.5,3698.5 2746.02,3702.02 DRV11873.11@2787.86,3702.02 2742.5,3698.5 ; 3034.67,3970.48 220UF.1@3034.67,4211
  Bottom Layer w13: 1K_3.2@2698.4,3597.28 ccw(c2694.42,3606) 2704,3606 ; v1(2701,3740) 2701,3864 v1(2737,3900) ; 1K_3.2@2704,3580 2704,3606 ; 1K_3.2@2709.6,3597.28 cw(c2713.58,3606) 2704,3606 ; 1K_3.2@2713.83,3594.26 cw(c2719.96,3600.04) 2714,3606 ; 1K_3.2@2716.97,3588.74 cw(c2743.58,3596.41) v1(2724,3616) 2714,3606 ; 10uf.2@2934,4207 2972,4207 ; 10uf.2@2948.56,4195.59 cw(c2972,4177.23) 2972,4207 ; 10uf.2@2948.56,4218.41 ccw(c2972,4236.77) 2972,4207 ; v1(2999,4163) 2999,4180 2972,4207 ; 2704,3606 2714,3606
VCC_MC: 1.1K,,.1 1.1K,.1 1.1K.1 2.2K.1 104,.2 220UF,,.1 1000UF,.1 7812.1 MS33035.17 POWER_MC.2 | length 2994.9
  Top Layer w20: v1@1842,2121 v1(1847,2126) 1997,2276 v1(2175,2276) 2319,2276 v1(2352,2243) v1(2558,2243) ; 2753,1815 2788,1815 2919,1684 2.2K.1@3009,1684 ; 2.2K.1@3001.93,1676.93 ccw(c2984.86,1659.86) 2984.86,1684 ccw(c2984.86,1708.14) 2.2K.1@3001.93,1691.07
  Top Layer w30: v1(1244,2117) 1244,1728 7812.1@1341,1631 ; MS33035.17@2691,1815 2753,1815 2816,1878 2816,1979 v1(2801,1994)
  Bottom Layer w30: v1(1244,2117) POWER_MC.2@1491,2117 ; 1254.61,2106.39 cw(c1280.21,2080.79) 1280.21,2117 cw(c1280.21,2153.21) 1254.61,2127.61 ; 2558,2233 cw(c2558,2208.86) 2575.07,2225.93 ; v1(2558,2243) 2595,2206 2595,2200 v1(2801,1994)
  Bottom Layer w50: POWER_MC.2@1491,2117 1828,2117 v1(1859,2148)
  other v1: 1246,2077 1831,2104
VCP: 104.2 DRV11873.4 | length 321.7
  Top Layer w13: DRV11873.4@2554,3752.41 v1(2610,3752.41)
  Bottom Layer w13: v1(2610,3752.41) 2676.41,3686 104.2@2778,3686 ; 104.2@2759.92,3672.92 ccw(c2728.34,3641.34) 2728.34,3686 ccw(c2728.34,3730.66) 104.2@2759.92,3699.08
W: 1K_5_.2 5824_2.2 CD4053.4 DRV11873.7 Motor.4 UVW_OUT_4017.3 | length 4911.4
  Top Layer w13: UVW_OUT_4017.3@1774,4624.97 cw(c1774,4569.38) 1813.31,4608.69 cw(c1852.62,4648) UVW_OUT_4017.3@1797.03,4648 ; UVW_OUT_4017.3@1774,4648 1963,4459 v1(1963,4129) ; v1(2096,3643) 2095,3642 2095,3279 2110,3264 v1(2150,3264) ; 1K_5_.2@2218,3624 2218,3637.35 2247.65,3637.35 ; 1K_5_.2@2230.89,3625 cw(c2247.65,3619.81) 2247.65,3637.35 ; Motor.4@2480.32,3360 ccw(c2372.45,3360) 2448.72,3436.28 ccw(c2525,3512.55) Motor.4@2525,3404.68 ; Motor.4@2493.32,3360 ccw(c2416.83,3360) 2470.92,3414.08 ccw(c2525,3468.17) Motor.4@2525,3391.68 ; Motor.4@2540.74,3401.82 ccw(c2551.8,3431.2) 2574,3409 ; v1(2554,3676.82) 2581.18,3676.82 2598,3660 2598,3474 2574,3450 2574,3409 ; Motor.4@2566.82,3375.74 cw(c2596.2,3386.8) 2574,3409 ; DRV11873.7@2570.54,3676.23 cw(c2570.54,3649.12) 2589.71,3668.29 ; 2247.65,3637.35 Motor.4@2525,3360 2574,3409
  Bottom Layer w13: CD4053.4@1449.24,3660.02 cw(c1440.18,3650.95) 1453,3650.95 cw(c1465.82,3650.95) CD4053.4@1456.76,3660.02 ; CD4053.4@1453,3695.27 1453,3650 1467,3636 ; CD4053.4@1458.25,3662.94 ccw(c1489.06,3658.06) 1467,3636 ; v1(1963,4129) 1963,3776 ; v1(2096,3643) 1963,3776 ; v1(2150,3264) 2269,3145 2475.42,3145 ; 5824_2.2@2484.26,3179.92 cw(c2450.54,3169.88) 2475.42,3145 ; 5824_2.2@2496.82,3220.97 ccw(c2454.11,3273) 2521.42,3273 ; Motor.4@2500.24,3322.8 cw(c2469.48,3276.59) 2525,3276.59 ; 5824_2.2@2505.06,3210.92 ccw(c2476.68,3245.51) 2521.42,3245.51 ccw(c2566.16,3245.51) 5824_2.2@2537.77,3210.92 ; Motor.4@2507.45,3333.63 cw(c2485.63,3300.86) 2525,3300.86 cw(c2564.37,3300.86) Motor.4@2542.55,3333.63 ; 5824_2.2@2510.34,3153.84 ccw(c2500.29,3120.13) 2475.42,3145 ; Motor.4@2525,3360 2525,3276.58 ; 5824_2.2@2546.02,3220.97 cw(c2588.72,3273) 2521.42,3273 ; Motor.4@2549.76,3322.8 ccw(c2580.52,3276.59) 2525,3276.59 ; 1467,3636 1824,3636 1963,3775 1963,3776 ; 2475.42,3145 5824_2.2@2521.42,3191 2521.42,3273 ; 2521.42,3273 2525,3276.58
  Bottom Layer w15: v1(2289,3595) 2400,3595 2476,3671 2501.38,3671 2507.2,3676.82 v1(2554,3676.82)
传5V: 22u_0.1 100uf.1 104_3.2 105.1 1117-3.3.3 DIG_POWER.3 DRV_OPT.4 LM2940.3 | length 5666.7
  Top Layer w13: DRV_OPT.4@3073.15,3632 3138,3632 ; DRV_OPT.4@3111.47,3618.48 cw(c3138,3599.23) 3138,3632 ; DRV_OPT.4@3111.47,3645.52 ccw(c3138,3664.77) 3138,3632 ; 3272.22,4346.22 ccw(c3253.44,4365) 3280,4365 cw(c3254.53,4365) 3272.54,4346.99 ; v1(3281,4365) 3281,4355.45 ; v1@3281,4366 ccw(c3281,4391.47) 3299.01,4373.46 ; LM2940.3@3317.84,4434.52 cw(c3291.97,4408.65) 3328.55,4408.65 cw(c3365.14,4408.65) LM2940.3@3339.27,4434.52 ; LM2940.3@3328.55,4465.91 3328.55,4403 3281,4355.45 ; v1(3351,4123) 3412,4123 v1(3629,3906) ; 3138,3632 3205,3699 3205,4279 ; 3205,4279 3205,4279.45 3281,4355.45 ; 3205,4279 3281,4355 3281,4355.45
  Bottom Layer w13: DIG_POWER.3@2210,4797.81 cw(c2210,4765.98) 2232.51,4788.49 cw(c2255.02,4811) DIG_POWER.3@2223.18,4811 ; DIG_POWER.3@2210,4811 2667,4354 104_3.2@3108,4354 ; 104_3.2@3094.92,4340.92 ccw(c3063.34,4309.34) 3063.34,4354 ccw(c3063.34,4398.66) 104_3.2@3094.92,4367.08 ; 3297.76,4365 ccw(c3297.76,4387.78) 100uf.1@3319.83,4382.11 ; 100uf.1@3307.24,4385.35 cw(c3281,4392.09) v1(3281,4365) 3330,4365 100uf.1@3330,4322 3330,4144 3331,4143 v1(3351,4123) ; 100uf.1@3313.38,4247.88 cw(c3273.27,4207.77) 3330,4207.77 cw(c3386.73,4207.77) 100uf.1@3346.62,4247.88 ; 22u_0.1@3615.5,3870.9 ccw(c3582.91,3903.49) 3629,3903.49 ccw(c3675.09,3903.49) 22u_0.1@3642.5,3870.9 ; 22u_0.1@3629,3857.4 v1(3629,3906) ; 105.1@3732,3870 3956,3870 3999.55,3870 4165,3704.55 1117-3.3.3@4270.91,3704.55 ; 105.1@3745.08,3856.92 cw(c3776.66,3825.34) 3776.66,3870 cw(c3776.66,3914.66) 105.1@3745.08,3883.08 ; 1117-3.3.3@4239.52,3693.84 ccw(c4213.65,3667.97) 4213.65,3704.55 ccw(c4213.65,3741.14) 1117-3.3.3@4239.52,3715.27
  Bottom Layer w15: 104_3.2@3099.16,4340.16 ccw(c3143.01,4384.01) 3143.01,4322 ; 104_3.2@3108,4354 3140,4322 ; 104_3.2@3109.77,4350.77 ccw(c3179.22,4420.22) 3179.22,4322 ; 104_3.2@3110.59,4331.69 cw(c3115.69,4297.69) 3140,4322 ; 104_3.2@3120.37,4361.37 ccw(c3215.43,4456.43) 3215.43,4322 ; 104_3.2@3125.5,4349 ccw(c3155.68,4349) 3134.34,4327.66 ; 100uf.1@3314.09,4248.59 cw(c3273.27,4207.77) 3331,4207.77 ; 100uf.1@3314.09,4306.09 ccw(c3275.68,4267.68) 3275.68,4322 ccw(c3275.68,4376.32) 100uf.1@3314.09,4337.91 ; 100uf.1@3314.09,4395.41 ccw(c3275.68,4433.82) 3330,4433.82 ccw(c3384.32,4433.82) 100uf.1@3345.91,4395.41 ; 100uf.1@3330,4365 v1(3330,4464) ; 3331,4143 3331,4321 100uf.1@3330,4322 3140,4322 ; 3331,4212.59 cw(c3381.91,4212.59) 100uf.1@3345.91,4248.59 ; 22u_0.1@3612.27,3870.19 ccw(c3593.61,3888.85) 3620,3888.85 ; 3620,3884.27 cw(c3650.73,3884.27) v1(3629,3906) ccw(c3660.99,3896.95) 22u_0.1@3631.97,3880.73 ; 3620,3913.3 ccw(c3680.96,3913.3) 22u_0.1@3637.85,3870.19 ; 3620,3915 3620,3866.4 22u_0.1@3629,3857.4 3719.4,3857.4 105.1@3732,3870 ; 22u_0.1@3645.73,3844.61 cw(c3676.61,3813.73) 3676.61,3857.4 cw(c3676.61,3901.08) 22u_0.1@3645.73,3870.19 ; 3671.41,3857.4 ccw(c3671.41,3925.59) 105.1@3719.63,3877.37 ; 105.1@3707.62,3857.4 ccw(c3707.62,3889.38) 105.1@3730.23,3866.77 ; 105.1@3708.09,3857.4 cw(c3708.09,3841.09) 105.1@3719.63,3852.63
pads on no net: 1117-3.3.4 CD4001.8 CD4001.9 CD4001.10 CD4013_.8 CD4013_.9 CD4013_.10 CD4013_.11 CD4013_.12 CD4013_.13 CD4018.3 CD4018.4 CD4018.9 CD4018.11 CD4018.12 CD4070.8 CD4070.9 CD4070.10 CD4070.11 CD4070.12 CD4070.13 DIG_POWER.1 LM358.5 LM358.6 LM358.7 LM2940.4 POWER_SW.1

## Polygon pours and split planes (outlines as drawn)
GND_DRV on Top Layer "Top Layer-No Net" (solid, remove dead copper, pour order 11): 2083,4532 1868,4317 1868,3194 1891,3194 2072,3013 2089,3030 3361,3030 3954,3030 4424,3500 4399,3525 4399,4132 3786,4132 3347,4571
GND on Top Layer "Top Layer-No Net" (solid, remove dead copper, pour order 8): 976,2689 3519,2689 3711,2881 3717,2875 4089,2875 4106,2875 4235,3004 4229,3010 4229,3256 4231,3256 4328,3353 4347,3372 4347,3451 3410,3451 3332,3373 3328,3369 3328,3151 3328,3139 3307,3118 3305,3116 2040,3116 2033,3123 2033,3215 2033,4377 2153,4497 2164,4508 3021,4508 3021,4486 3152,4355 3168,4339 3495,4339 3513,4321 3515,4319 3515,3690 3515,3682 3507,3674 3505,3676 3192,3676 3184,3676 3159,3651 3154,3646 3154,3479 3154,3465 3190,3429 3221,3460 4399,3460 4355,3460 4331,3436 4334,3433 4334,3374 4741,3374 4920,3553 4921.26,3554.26 4921.26,4921.26 984.25,4921.26
GND_MC on Top Layer "Top Layer-No Net" (solid, remove dead copper, pour order 4): 1021,2619 3692,2619 3692,988 3692,986 1016,986 1003,986 1003,2622
GND_DRV on Bottom Layer "Top Layer-No Net" (solid, remove dead copper, pour order 11): 2083,4532 1868,4317 1868,3194 1891,3194 2072,3013 2089,3030 3361,3030 3954,3030 4424,3500 4399,3525 4399,4132 3786,4132 3347,4571
GND on Bottom Layer "Top Layer-No Net" (solid, remove dead copper, pour order 8): 976,2689 3519,2689 3711,2881 3717,2875 4089,2875 4106,2875 4235,3004 4229,3010 4229,3256 4231,3256 4328,3353 4347,3372 4347,3451 3410,3451 3332,3373 3328,3369 3328,3151 3328,3139 3307,3118 3305,3116 2040,3116 2033,3123 2033,3215 2033,4377 2153,4497 2164,4508 3021,4508 3021,4486 3152,4355 3168,4339 3495,4339 3513,4321 3515,4319 3515,3690 3515,3682 3507,3674 3505,3676 3192,3676 3184,3676 3159,3651 3154,3646 3154,3479 3154,3465 3190,3429 3221,3460 4399,3460 4355,3460 4331,3436 4334,3433 4334,3374 4741,3374 4920,3553 4921.26,3554.26 4921.26,4921.26 984.25,4921.26
GND_MC on Bottom Layer "Top Layer-No Net" (solid, remove dead copper, pour order 3): 1021,2619 3692,2619 3692,988 3692,986 1016,986 1003,986 1003,2622

## Keep-outs
Keep-Out Layer:
  lines w10: 4920,3553 4736,3369 4308,3369 4202,3263 4202,2974 4095,2867 3734,2867 3564,2697 984.25,2697 984.25,4921.26 4921.26,4921.26 4921.26,3553

## Other copper
Top Layer:
  rectangle net Net,,,,,,_1: 3496,1564 3630,2379

## Silkscreen, mask and mechanical layers (free items; w line width, h text height)
Top Overlay:
  text "V R T G" at 4079,4780 h40
  text "ON" at 2174,4721 h40
  text "ON" at 3006,4714 h40
  text "KEY" at 4660,4658 h40
  text "V S R G" at 4072,4585 h40
  text "KEY" at 4660,4555 h40
  text "KEY" at 4660,4058 h40
  text "KEY" at 4660,3953 h40
  text "DRV_ON" at 3539,3920 h40
  text "DIR" at 3539,3810 h40
  text "555" at 2064,3740 h40
  text "MCU" at 2250,3739 h40
  text "LOW SPEED" at 3539,3706.67 h40
  text "SDA SCL G V33" at 4540,3698 h60 r90
  text "358_ON" at 3535,3616 h40
  text "+" at 4825,3572 h60
  text "W V U COM" at 2641,3539 h40
  text "MOS_GND" at 3448,2521 h40
  text "COM_GND" at 3149,2518 h40
  text "14V-24V" at 1065,2173 h40
  text "+++" at 1128,2078 h80
  text "10K_ADJ" at 1919,1511 h40
  text "EN-60/120-DIR-BREAK" at 1888,1198 h40
  text "GND" at 2539,1095 h40
Bottom Overlay:
  text "PD3 TIM2_CH2 ADC" at 4765,4651 h40
  text "PD2 TIM2_CH3" at 4757,4560 h40
  text "PD1" at 4763,4460 h40
  text "PC7 MISO" at 4768,4361 h40
  text "PC6 MOSI" at 4768,4256 h40
  text "PC5 SPI_SCL" at 4768,4156 h40
  text "PC4 TIM1_CH4" at 4766,4062 h40
  text "PC3 TIM1_CH3" at 4766,3958 h40
  text "PB4 SCL" at 4773,3859 h40
  text "PB5 SDA" at 4773,3762 h40
Top Solder:
  rectangle: 3496,1564 3630,2379